# Altium PCB RD15002WV-20150923.PcbDoc (part 1 of 2)
Units mil, origin at the board's own origin, x right, y up, seen from the top; angles counter-clockwise.
Board outline 4341.03 x 4341.12 mil, 2 copper layers (Top Layer, Bottom Layer); 295 components, 256 nets, 1005 pads, 234 vias.
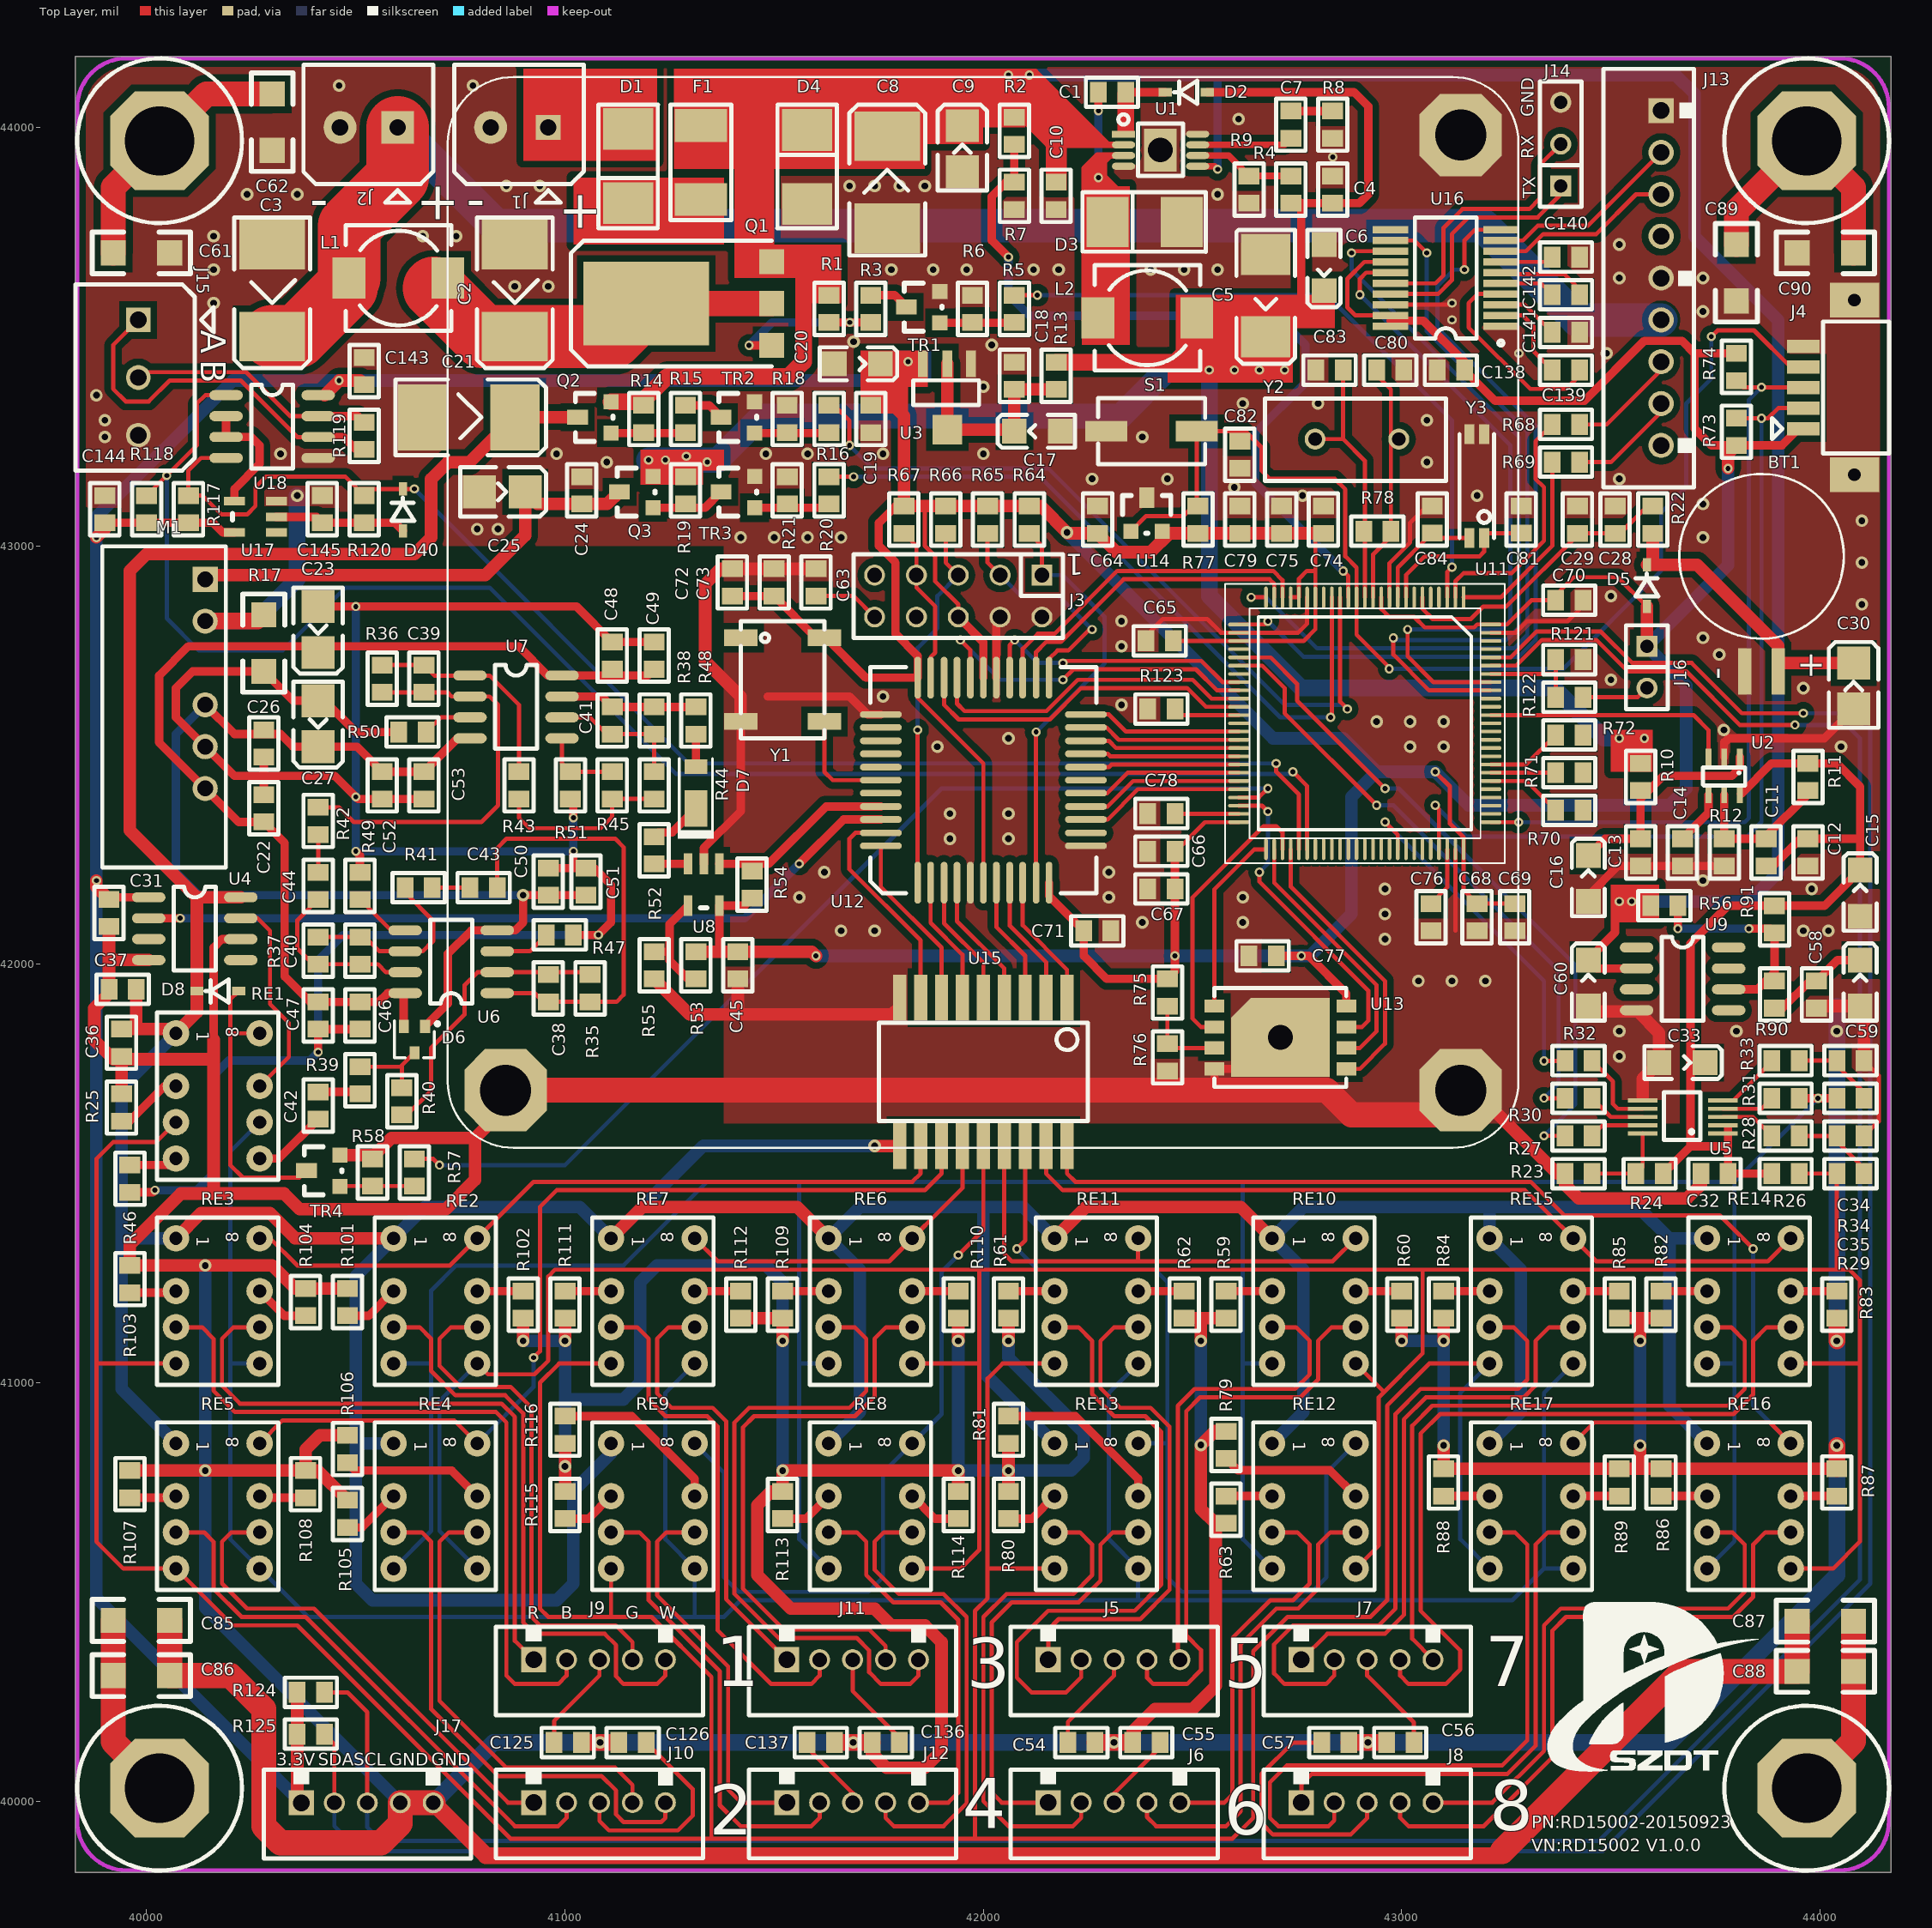
[diagram p0: Top Layer view]
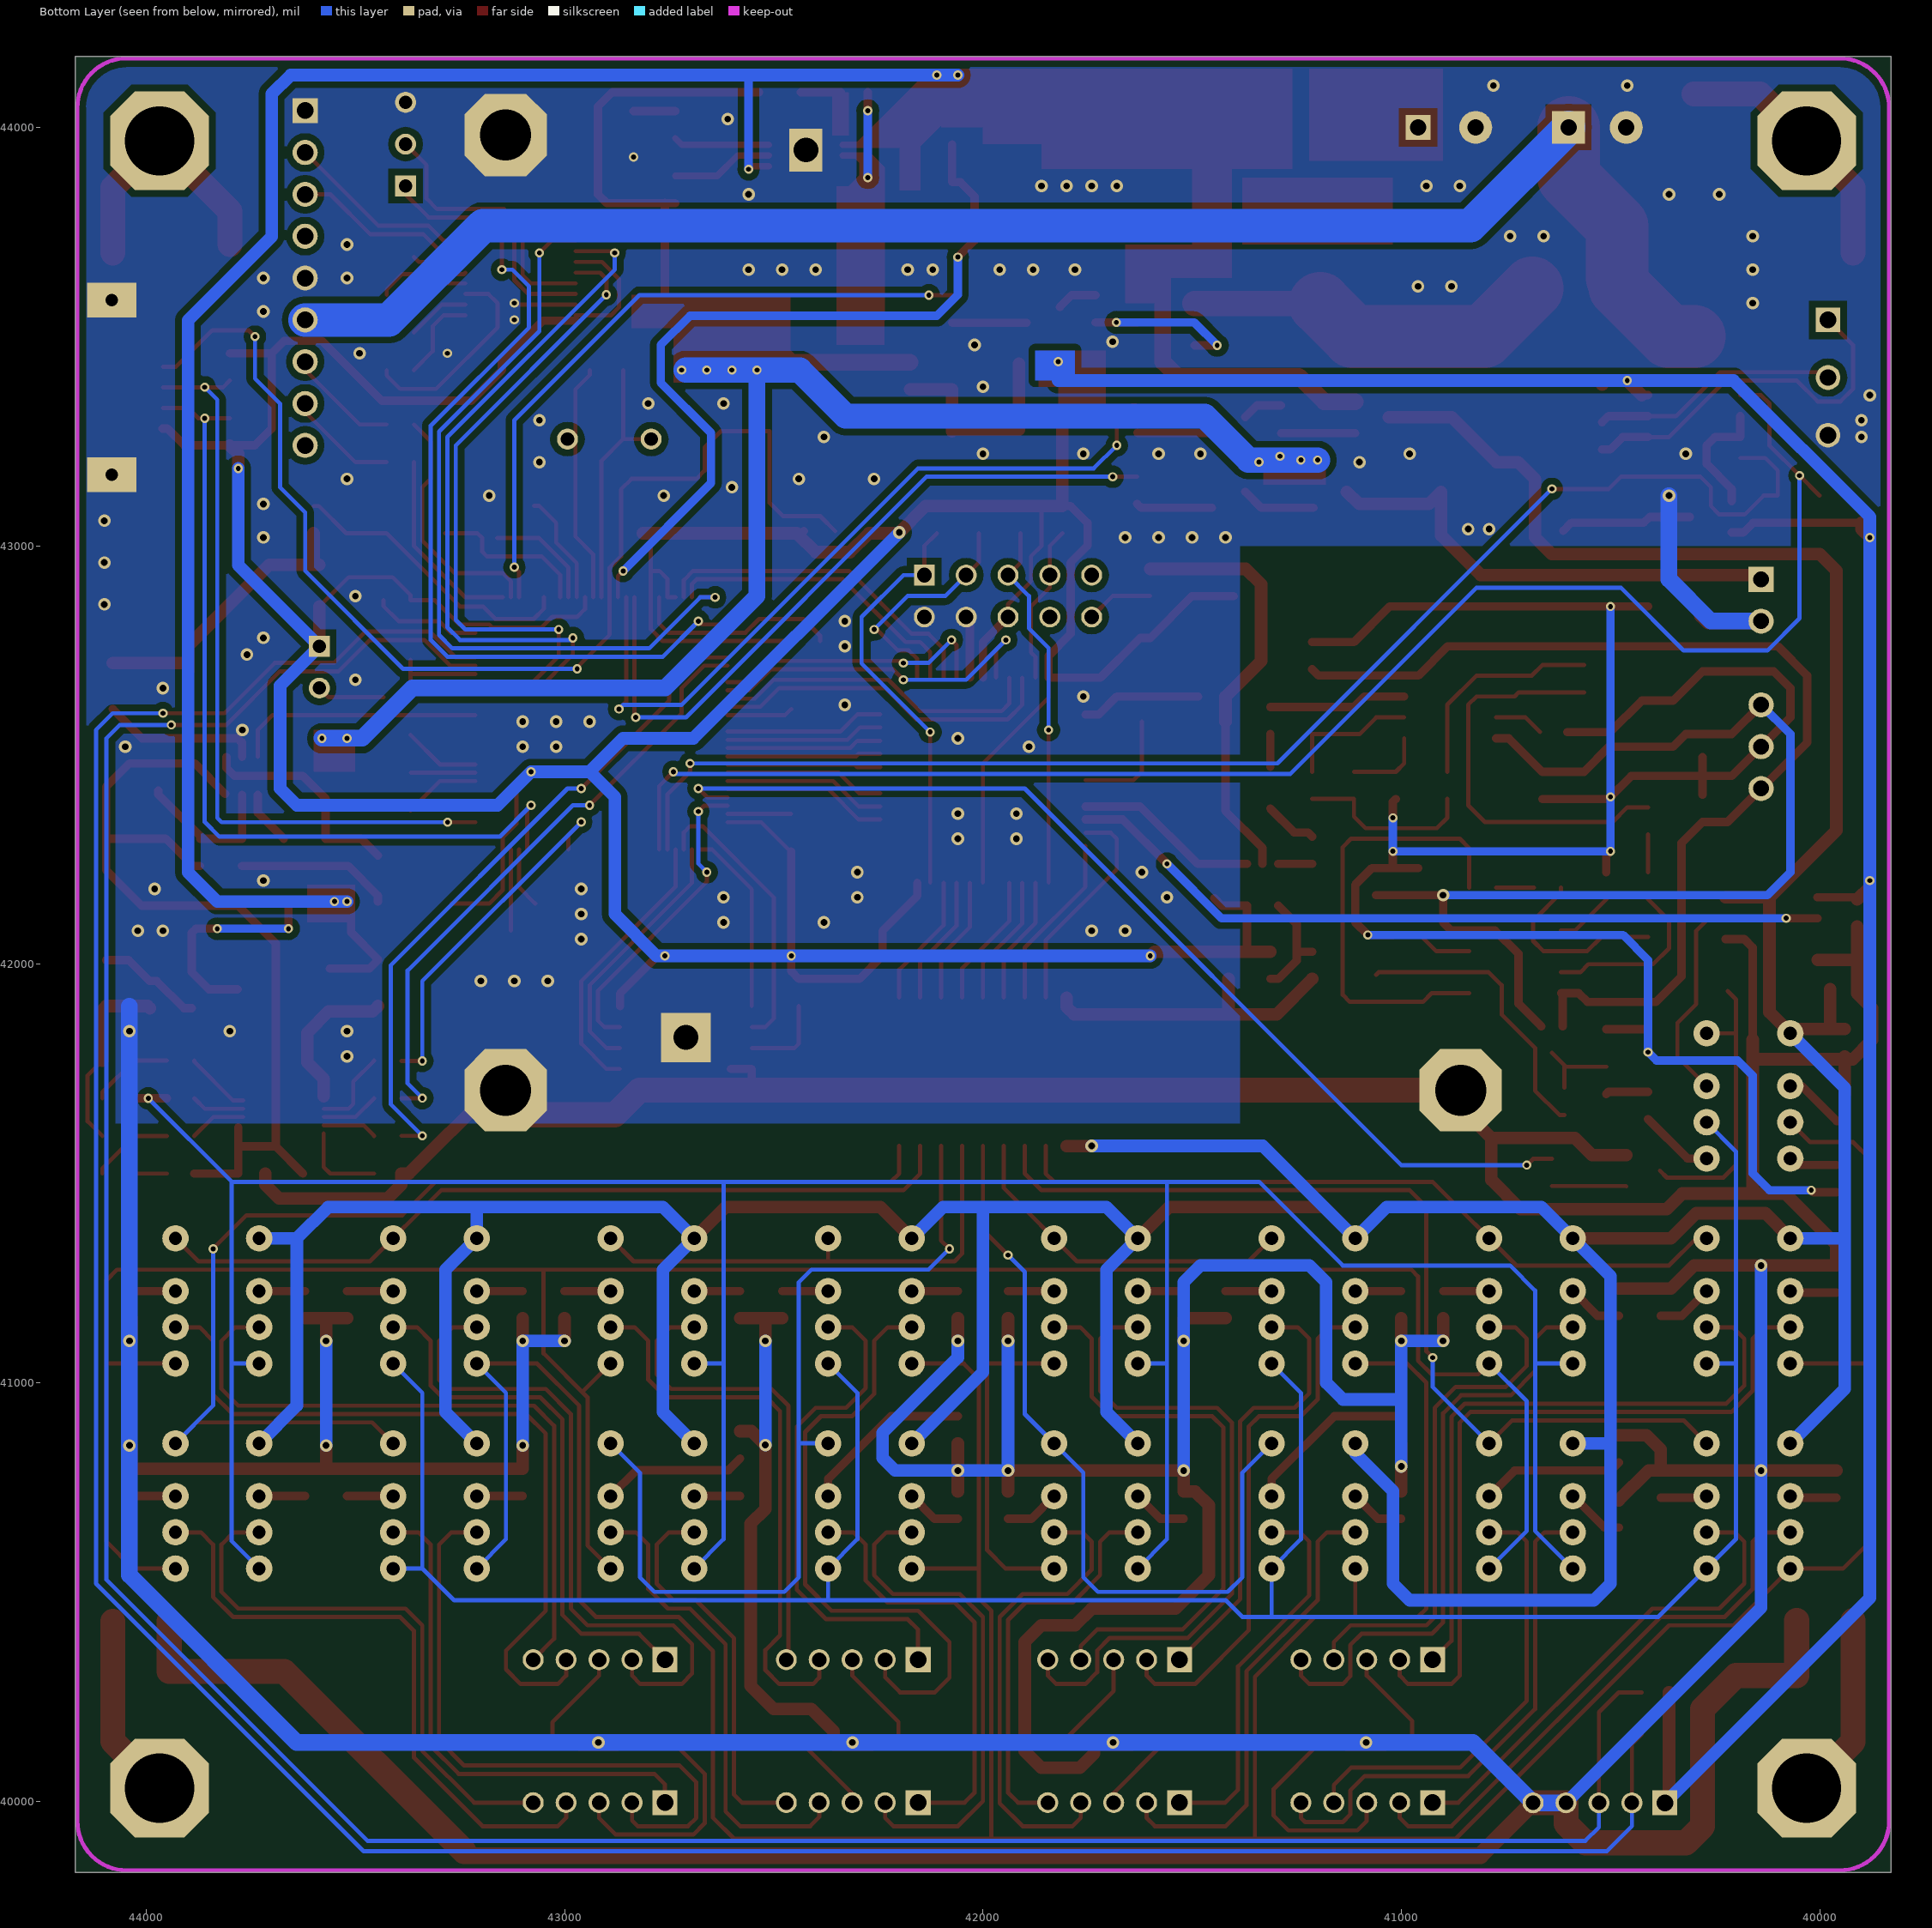
[diagram p1: Bottom Layer view, seen from below]

## Layer stack, top to bottom
Top Layer: signal copper 1.4
Dielectric: dielectric 12.6, FR-4, Dk 4.8
Bottom Layer: signal copper 1.4

## Board outline
39828.95,39829.02 44169.98,39829.02 44169.98,44170.15 39828.95,44170.15

## Design rules (kind name [scope] priority, off if disabled: settings)
Clearance Clearance_1 [All] p1 off: gap=16
Clearance [All] p2: gap=6
ComponentClearance [All] p1 off: gap=10 collisioncheckmode=3 verticalgap=10 showdistances=FALSE
Height [All] p1 off: minheight=0 maxheight=1000 prefheight=500
HoleSize [All] p1: absolutevalues=TRUE maxlimit=1000 minlimit=1 maxpercent=80.000 minpercent=20.000
MinimumSolderMaskSliver [All] p1: minsoldermaskwidth=0
PolygonConnect [All] p1: connectstyle=Direct reliefconductorwidth=10 reliefentries=4 polygonreliefangle="90 Angle" airgapwidth=10
RoutingPriority [All] p1: routingpriority=4
RoutingVias [All] p1: holewidth=20 width=50 viastyle="Through Hole" minholewidth=28 minwidth=50 maxholewidth=28 maxwidth=50
SilkToSilkClearance [All] p1: silktosilkclearance=0
SilkToSolderMaskClearance [IsPad] p1: minsilkscreentomaskgap=0 clearancetoexposedcopper=TRUE
SolderMaskExpansion [All] p1: expansion=4
Width [All] p1: maxlimit=1000 minlimit=10 preferedwidth=10
21 further rules are at their usual default settings.

## Components (designator, comment, footprint, x,y, rotation, side; value= is the part's Value field where it differs from the comment)
BT1 "MS920T" MS920T 43900,42700 r270 top
C1 "10nF" CC0603 42275,44084 r0 top
C2 "100uF/20V" CD7343 40880,43500 r90 top
C3 "100uF/20V" CD7343 40300,43500 r90 top
C4 "0.1uF" CC0603 42835,43884 r270 top
C5 "100uF/6.3V" CC6032 42675,43500 r90 top
C6 "10uF/16V" CA3216 42814.37,43610 r90 top
C7 "1.5nF" CC0603 42735,44039 r270 top
C8 "100uF/20V" CD7343 41770.22,43979 r270 top
C9 "22uF/16V" CB3528 41949.83,44004 r270 top
C10 "0.1uF" CC0603 42173.88,43804 r90 top
C11 "15pF" CC0603 43871,42235 r90 top
C12 "0.1uF" CC0603 43971,42235 r90 top
C13 "1uF" CC0603 43571,42235 r90 top
C14 "0.1uF" CC0603 43671,42235 r90 top
C15 "4.7uF/10V" CA3216 44095.74,42225 r270 top
C16 "4.7uF/10V" CA3216 43446,42260 r270 top
C17 "4.7uF/10V" CA3216 42074,43274 r0 top
C18 "0.1uF" CC0603 42074,43439 r270 top
C19 "0.1uF" CC0603 41731,43270.63 r90 top
C20 "4.7uF/10V" CA3216 41754,43435 r180 top
C21 "100uF/20V" CD7343 40880,43307 r180 top
C22 "0.1uF" CC0603 40280,42405 r270 top
C23 "22uF/16V" CB3528 40410,42745 r90 top
C24 "0.1uF" CC0603 41040,43165 r270 top
C25 "22uF/16V" CB3528 40905,43129 r180 top
C26 "0.1uF" CC0603 40280,42495 r90 top
C27 "22uF/16V" CB3528 40410,42520 r90 top
C28 "0.1uF" CC0603 43510,43095 r270 top
C29 "0.1uF" CC0603 43420,43095 r270 top
C30 "22uF/16V" CB3528 44080,42720 r270 top
C31 "0.1uF" CC0603 39910,42155 r270 top
C32 "0.1uF" CC0603 43715,41499.63 r0 top
C33 "10uF/16V" CA3216 43725,41765 r180 top
C34 "Cap" CC0603 44040,41769.63 r0 top
C35 "Cap" CC0603 44040,41589.63 r0 top
C36 "0.1uF" CC0603 39940,41780 r90 top
C37 "0.1uF" CC0603 39910,41940 r0 top
C38 "100pF" CC0603 40960,41910 r90 top
C39 "100pF" CC0603 40663,42715 r270 top
C40 "100pF" CC0603 40510,42000 r90 top
C41 "100pF" CC0603 41113,42615 r270 top
C42 "0.1uF" CC0603 40410,41695 r270 top
C43 "0.1uF" CC0603 40773,42183 r0 top
C44 "0.1uF" CC0603 40410,42220 r270 top
C45 "0.1uF" CC0603 41413,41965 r90 top
C46 "0.1uF" CC0603 40510,41845 r90 top
C47 "1uF" CC0603 40410,41845 r90 top
C48 "1uF" CC0603 41113,42770 r270 top
C49 "0.1uF" CC0603 41213,42770 r270 top
C50 "0.1uF" CC0603 40960,42165 r90 top
C51 "0.1uF" CC0603 41050,42165 r90 top
C52 "1uF" CC0603 40563,42460 r270 top
C53 "1uF" CC0603 40663,42460 r270 top
C54 "Cap" CC0603 42267,40140 r180 top
C55 "Cap" CC0603 42357,40140 r0 top
C56 "Cap" CC0603 42964,40140 r0 top
C57 "Cap" CC0603 42874,40140 r180 top
C58 "0.1uF" CC0603 43991.37,41895 r90 top
C59 "4.7uF/10V" CA3216 44095.74,42010 r270 top
C60 "10uF/16V" CA3216 43446,42010 r270 top
C61 "CC1206KRX7R0BB102" CC1206 39920,43700 r0 top
C62 "CC1206KRX7R0BB102" CC1206 40300,44080 r270 top
C63 "0.1uF" CC0603 41600,42945 r270 top
C64 "0.1uF" CC0603 42273,43030 r90 top
C65 "0.1uF" CC0603 42454,42773 r180 top
C66 "0.1uF" CC0603 42458,42270 r180 top
C67 "0.1uF" CC0603 42458,42180 r180 top
C68 "0.1uF" CC0603 43180,42145 r270 top
C69 "0.1uF" CC0603 43270,42145 r270 top
C70 "0.1uF" CC0603 43368,42870 r0 top
C71 "0.1uF" CC0603 42240,42080 r0 top
C72 "0.1uF" CC0603 41400,42880 r90 top
C73 "0.1uF" CC0603 41500,42880 r90 top
C74 "0.1uF" CC0603 42813,43095 r270 top
C75 "0.1uF" CC0603 42713,43095 r270 top
C76 "0.1uF" CC0603 43070,42145 r270 top
C77 "0.1uF" CC0603 42700,42020 r180 top
C78 "0.1uF" CC0603 42458,42360 r180 top
C79 "0.1uF" CC0603 42613,43095 r270 top
C80 "20pF" CC0603 42940,43420 r0 top
C81 "10pF" CC0603 43285.68,43095.38 r270 top
C82 "1uF" CC0603 42613,43185 r90 top
C83 "20pF" CC0603 42860,43420 r180 top
C84 "10pF" CC0603 43073,43095.38 r270 top
C85 "CC1206KRX7R0BB102" CC1206 39920,40432 r0 top
C86 "CC1206KRX7R0BB102" CC1206 39920,40300 r0 top
C87 "CC1206KRX7R0BB102" CC1206 44080,40430 r180 top
C88 "CC1206KRX7R0BB102" CC1206 44080,40310 r180 top
C89 "CC1206KRX7R0BB102" CC1206 43800,43720 r270 top
C90 "CC1206KRX7R0BB102" CC1206 44080,43700 r180 top
C125 "Cap" CC0603 41039,40140 r180 top
C126 "Cap" CC0603 41129,40140 r0 top
C136 "Cap" CC0603 41734,40140 r0 top
C137 "Cap" CC0603 41644,40140 r180 top
C138 "0.1uF" CC0603 43150,43420 r180 top
C139 "0.1uF" CC0603 43360,43420 r0 top
C140 "0.1uF" CC0603 43360,43690 r0 top
C141 "0.1uF" CC0603 43425,43510 r180 top
C142 "0.1uF" CC0603 43360,43600 r0 top
C143 "0.1uF" CC0603 40520,43385.25 r90 top
C144 "0.1uF" CC0603 39900,43055 r90 top
C145 "100pF" CC0603 40420,43120.25 r270 top
D1 "SS24" SSMB 41151,43996.17 r90 top
D2 "CMDSH-3" SOD323 42535,44084 r180 top
D3 "SS24" SSMB 42474,43774 r0 top
D4 "SMBJ18A" SMB 41578.67,43816.83 r90 top
D5 "CMDSH-3" SOD323 43586,42855 r90 top
D6 "DESD1P0RFW-7" SOT-323 40640,41820 r270 top
D7 "DFLS1200-7" powerDI123 41313,42422.25 r90 top
D8 "CMDSH-3" SOD323 40220,41936 r180 top
D40 "1N4148" SOD323 40612.56,43036 r90 top
F1 "500mA" CC1812 41324.83,43827.62 r90 top
J1 "DC12V" ECH350H-2P#1 40960,44000 r180 top
J2 "DTU-POWER" ECH350H-2P#2 40600,44000 r180 top
J3 "Header 5X2" IDC10-2.54MM 42140,42930 r180 top
J4 "Header 5" MOLEX532610571 43960,43280 r90 top
J5 "CON5" CON5-2.0MM 42155,40338 r0 top
J6 "CON5" CON5-2.0MM 42155,39996.26 r0 top
J7 "CON5" CON5-2.0MM 42760,40338 r0 top
J8 "CON5" CON5-2.0MM 42760,39996.26 r0 top
J9 "CON5" CON5-2.0MM 40925,40338 r0 top
J10 "CON5" CON5-2.0MM 40925,39996.26 r0 top
J11 "CON5" CON5-2.0MM 41530,40338 r0 top
J12 "CON5" CON5-2.0MM 41530,39996.26 r0 top
J13 "HD-DB9" CON9-2.54MM 43620,44040 r270 top
J14 "COM2" SIP3-2.54 43380,43860 r90 top
J15 "COM3" ECH350H-3P 39980,43540 r270 top
J16 "BOOT" SIP2-2.54MM 43586,42760 r270 top
J17 "CON5" CON5-2.0MM 40370,39996 r0 top
L1 "10uH" SLF6025 40720,43640 r180 top
L2 "10uH" SLF6025 42274,43545 r0 top
M1 "NMH050XSC" NMH_SC 40140,42920 r270 top
Q1 "FR5305" TO-252 41494,43479 r90 top
Q2 "CJ2301" SOT-23W 41110.02,43269.64 r90 top
Q3 "CJ2301" SOT-23W 41210.11,43091.02 r90 top
R1 "10K" CC0603 41631,43534 r90 top
R2 "499K" CC0603 42073.88,44024 r270 top
R3 "10K" CC0603 41731,43534 r90 top
R4 "330K" CC0603 42735,43819 r90 top
R5 "1K" CC0603 42073.99,43534 r90 top
R6 "10K" CC0603 41973.99,43599 r270 top
R7 "100K" CC0603 42073.88,43869 r270 top
R8 "4.7K" CC0603 42835,43974 r90 top
R9 "100K" CC0603 42635,43819 r90 top
R10 "0R" CC0603 43571,42415 r90 top
R11 "51K" CC0603 43971,42480 r270 top
R12 "30.1K" CC0603 43771,42235 r90 top
R13 "0R" CC0603 42174,43374 r90 top
R14 "10K" CC0603 41188.01,43270.63 r90 top
R15 "10K" CC0603 41288.01,43270.63 r90 top
R16 "1K" CC0603 41631,43270.63 r90 top
R17 "0R" CC1206 40280,42700 r90 top
R18 "10K" CC0603 41531,43335.63 r270 top
R19 "10K" CC0603 41288.1,43100 r90 top
R20 "1K" CC0603 41631.1,43100 r90 top
R21 "10K" CC0603 41531.1,43165 r270 top
R22 "1K" CC0603 43600,43095 r270 top
R23 "10K" CC0603 43390,41499.63 r0 top
R24 "10K" CC0603 43625,41499.63 r180 top
R25 "1K" CC0603 39940,41625 r90 top
R26 "1K" CC0603 43950,41499.63 r180 top
R27 "22R" CC0603 43390,41589.63 r0 top
R28 "1K" CC0603 43950,41589.63 r180 top
R29 "1K" CC0603 44040,41499.63 r0 top
R30 "22R" CC0603 43390,41679.63 r0 top
R31 "1K" CC0603 43950,41679.63 r180 top
R32 "22R" CC0603 43390,41769.63 r0 top
R33 "1K" CC0603 43950,41769.63 r180 top
R34 "1K" CC0603 44040,41679.63 r0 top
R35 "100K" CC0603 41060,41910 r90 top
R36 "100K" CC0603 40563,42715 r270 top
R37 "100K" CC0603 40410,42000 r90 top
R38 "100K" CC0603 41213,42615 r270 top
R39 "1K" CC0603 40510,41755 r270 top
R40 "4.7K" CC0603 40610,41640 r90 top
R41 "4.7K" CC0603 40618,42183 r0 top
R42 "4.7K" CC0603 40410,42375 r270 top
R43 "4.7K" CC0603 40890,42395 r90 top
R44 "4.7K" CC0603 41213,42460 r270 top
R45 "4.7K" CC0603 41113,42460 r270 top
R46 "1K" CC0603 39960,41520 r270 top
R47 "1K" CC0603 40955,42070 r0 top
R48 "1K" CC0603 41313,42615 r270 top
R49 "1K" CC0603 40510,42155 r90 top
R50 "1K" CC0603 40668,42555 r180 top
R51 "1K" CC0603 41013,42460 r270 top
R52 "1K" CC0603 41213,42240 r90 top
R53 "100K" CC0603 41313,42030 r270 top
R54 "10K" CC0603 41447,42158 r90 top
R55 "100K" CC0603 41213,42030 r270 top
R56 "357R" CC0603 43660,42140 r180 top
R57 "1K" CC0603 40639.99,41470 r90 top
R58 "10K" CC0603 40539.99,41535 r270 top
R59 "1K" CC0603 42580,41154 r90 top
R60 "1K" CC0603 43000,41219 r270 top
R61 "1K" CC0603 42060,41154 r90 top
R62 "1K" CC0603 42480,41219 r270 top
R63 "1K" CC0603 42580,40664 r90 top
R64 "4.7K" CC0603 42110,43030 r90 top
R65 "4.7K" CC0603 42010,43030 r90 top
R66 "4.7K" CC0603 41910,43095 r270 top
R67 "4.7K" CC0603 41810,43030 r90 top
R68 "22R" CC0603 43425,43290 r180 top
R69 "22R" CC0603 43425,43200 r180 top
R70 "22R" CC0603 43368,42368 r0 top
R71 "22R" CC0603 43368,42458 r0 top
R72 "22R" CC0603 43368,42548 r0 top
R73 "10K" CC0603 43800,43240 r90 top
R74 "10K" CC0603 43800,43460 r270 top
R75 "10K" CC0603 42440,41965 r270 top
R76 "10K" CC0603 42440,41810 r270 top
R77 "10K" CC0603 42513,43030 r90 top
R78 "1M" CC0603 42974,43035 r180 top
R79 "1K" CC0603 42580,40819 r90 top
R80 "1K" CC0603 42060,40740 r270 top
R81 "1K" CC0603 42060,40920 r270 top
R82 "1K" CC0603 43620,41154 r90 top
R83 "1K" CC0603 44040,41219 r270 top
R84 "1K" CC0603 43100,41154 r90 top
R85 "1K" CC0603 43520,41219 r270 top
R86 "1K" CC0603 43620,40794 r270 top
R87 "1K" CC0603 44039.98,40729.02 r90 top
R88 "1K" CC0603 43100,40794 r270 top
R89 "1K" CC0603 43519.97,40729.03 r90 top
R90 "0R" CC0603 43891,41895 r90 top
R91 "0R" CC0603 43891,42140 r270 top
R101 "1K" CC0603 40480,41225 r270 top
R102 "1K" CC0603 40900,41219 r270 top
R103 "1K" CC0603 39960,41280 r270 top
R104 "1K" CC0603 40380,41160 r90 top
R105 "1K" CC0603 40480,40719 r270 top
R106 "1K" CC0603 40480,40809 r90 top
R107 "1K" CC0603 39960,40790 r270 top
R108 "1K" CC0603 40380,40725 r90 top
R109 "1K" CC0603 41520,41154 r90 top
R110 "1K" CC0603 41940,41219 r270 top
R111 "1K" CC0603 41000,41154 r90 top
R112 "1K" CC0603 41420,41219 r270 top
R113 "1K" CC0603 41520,40740 r270 top
R114 "1K" CC0603 41940,40675 r90 top
R115 "1K" CC0603 41000,40740 r270 top
R116 "1K" CC0603 41000,40920 r270 top
R117 "10K" CC0603 40100,43120 r270 top
R118 "10K" CC0603 40000,43055 r90 top
R119 "120R" CC0603 40520,43230.25 r90 top
R120 "10K" CC0603 40520,43120.25 r270 top
R121 "100K" CC0603 43368,42728 r0 top
R122 "1K" CC0603 43433,42638 r180 top
R123 "100K" CC0603 42393,42610 r0 top
R124 "3.3K" CC0603 40360,40260 r0 top
R125 "3.3K" CC0603 40360,40160 r0 top
RE1 "G6K" G6K 40070,41835 r270 top
RE2 "G6K" G6K 40590,41345 r270 top
RE3 "G6K" G6K 40070,41345 r270 top
RE4 "G6K" G6K 40590,40855 r270 top
RE5 "G6K" G6K 40070,40855 r270 top
RE6 "G6K" G6K 41630,41345 r270 top
RE7 "G6K" G6K 41110,41345 r270 top
RE8 "G6K" G6K 41630,40855 r270 top
RE9 "G6K" G6K 41110,40855 r270 top
RE10 "G6K" G6K 42690,41345 r270 top
RE11 "G6K" G6K 42170,41345 r270 top
RE12 "G6K" G6K 42690,40855 r270 top
RE13 "G6K" G6K 42170,40855 r270 top
RE14 "G6K" G6K 43730,41345 r270 top
RE15 "G6K" G6K 43210,41345 r270 top
RE16 "G6K" G6K 43730,40855 r270 top
RE17 "G6K" G6K 43210,40855 r270 top
S1 "SW-PB" SPST 42294,43274 r0 top
TR1 "MMBT3904" SOT-23W 41896,43533.02 r90 top
TR2 "MMBT3904" SOT-23W 41453.01,43269.64 r90 top
TR3 "MMBT3904" SOT-23W 41453.1,43091.02 r90 top
TR4 "MMBT3904" SOT-23W 40462,41469.02 r90 top
U1 "LT1767" MS8 42335,43984 r0 top
U2 "TPS3901" SOT-26 43808,42495.32 r180 top
U3 "GM6250" SOT-89 41970,43435 r180 top
U4 "FAN7371" SO-8 40005,42160 r0 top
U5 "LTC2402" MS10 43768,41595.63 r90 top
U6 "LT1807" SO-8 40838,41931 r180 top
U7 "LT1807" SO-8 40773,42690 r0 top
U8 "TLV3491AID" SOT-23-5 41369,42240 r0 top
U9 "LT1019AIS8-5" SO-8 43561.37,42040 r0 top
U11 "STM32F407VE_100" TQFP100 43148,42877 r270 top
U12 "LC4064V" QFP44 41843,42195 r90 top
U13 "SST25VF064C" WSON-8 42710,41825 r0 top
U14 "STM1001TWX6F" SOT-23W 42353,43035 r0 top
U15 "ULN2803A" DSO18 42200,41920 r180 top
U16 "MAX3223EEAP" TSSOP20 43237,43525 r180 top
U17 "74HC1G14" SOT-23-5 40310,43032 r270 top
U18 "SN65HVD72/75/78" SO-8 40190,43360 r0 top
Y1 "1MHz" PCRYSTAL 41420,42780 r270 top
Y2 "8M" XCYAI 42893,43255 r0 top
Y3 "MC-146" MC-146 43197.06,43019 r90 top
? "" LOGO 43575,40275 r0 top

## Footprints (in the part's own frame and the unit in brackets; to place one, negate y for a bottom-side part, rotate by r counter-clockwise, add the part's x,y. Pads: shape width x height; smd on the part's side, far side on the other; paste and mask are expansions set on the pad)
CA3216 [mm]
  rect 1.5x1.5 smd: 1(0,0) 2(2.794,0)
  silkscreen extent -1.02,-1 3.68,1
CB3528 [mm]
  rect 2x2 smd: 1(0,0) 2(2.794,0)
  silkscreen extent -1.27,-1.5 3.94,1.5
CC0603 [mil]
  rect 40x50 smd: 1(0,0) 2(65,0)
  silkscreen extent -30,-35 95,35
CC1206 [mil]
  rect 60x60 smd: 1(0,0) 2(135,0)
  silkscreen extent -50,-50 185,50
CC1812 [mm]
  rect 2x3.2 smd: 1(0,0) 2(4.5,0)
  silkscreen extent -1.25,-1.85 5.75,1.85
CC6032 [mm]
  rect 2.5x3 smd: 1(0,0) 2(5,0)
  silkscreen extent -1.65,-1.78 6.48,1.78
CD7343 [mm]
  rect 3x4 smd: 1(0,0) 2(5.588,0)
  silkscreen extent -1.91,-2.3 7.24,2.3
CON5-2.0MM [mil]
  rect 60x60 hole 40: 1(0,0)
  round 50 hole 35: 2(78.74,0) 3(157.48,0) 4(236.22,0) 5(314.96,0)
  silkscreen extent -90,-133 405,79
CON9-2.54MM [mil]
  rect 60x60 hole 40: 1(0,0)
  round 60 hole 40: 2(100,0) 3(200,0) 4(300,0) 5(400,0) 6(500,0) 7(600,0) 8(700,0) 9(800,0)
  silkscreen extent -100,-138 900,79
DSO18 [mm]
  rect 0.8x2.8 smd: 1(0,0) 2(1.27,0) 3(2.54,0) 4(3.81,0) 5(5.08,0) 6(6.35,0) 7(7.62,0) 8(8.89,0) 9(10.16,0) 10(10.16,9) 11(8.89,9) 12(7.62,9) 13(6.35,9) 14(5.08,9) 15(3.81,9) 16(2.54,9) 17(1.27,9) 18(0,9)
  silkscreen extent -1.27,1.52 11.43,7.49
ECH350H-2P#1 [mm]
  rect 1.5x1.5 hole 1: 1(0,0)
  round 2 hole 1: 2(3.5,0)
  silkscreen extent -2.16,-3.81 5.72,4.57
ECH350H-2P#2 [mm]
  rect 2x2 hole 1: 1(0,0)
  round 2 hole 1: 2(3.5,0)
  silkscreen extent -2.16,-3.81 5.72,4.57
ECH350H-3P [mm]
  rect 1.5x1.5 hole 1: 1(0,0)
  round 1.5 hole 1: 2(3.5,0) 3(7,0)
  silkscreen extent -2.16,-3.81 9.14,4.57
G6K [mm]
  round 1.6 hole 0.8: 1(0,0) 2(3.2,0) 3(5.4,0) 4(7.6,0) 5(7.6,5.08) 6(5.4,5.08) 7(3.2,5.08) 8(0,5.08)
  silkscreen extent -1.27,-1.14 8.89,6.22
IDC10-2.54MM [mil]
  rect 50x50 hole 35: 1(0,0)
  round 50 hole 35: 2(0,100) 3(100,0) 4(100,100) 5(200,0) 6(200,100) 7(300,0) 8(300,100) 9(400,0) 10(400,100)
  silkscreen extent -50,-50 450,150
LOGO [mil]
  silkscreen extent -227,-203 278,200
MC-146 [mm]
  rect 1.2x0.6 smd: 1(0,0) 2(6.3,0) 3(6.3,0.9) 4(0,0.9)
  silkscreen extent 0,-0.6 6.3,1.5
MOLEX532610571 [mm]
  rect 0.8x2 smd: 1(0,0) 2(1.25,0) 3(2.5,0) 4(3.75,0) 5(5,0)
  rect 2.1x3 hole 0.762: ""(-2.8,-3.1) ""(7.8,-3.1)
  silkscreen extent -1.5,-5.2 6.5,1.91
MS8 [mm]
  rect 1.4x0.42 smd: 1(0,0)
  oval 1.4x0.42 smd: 2(0,-0.65) 3(0,-1.3) 4(0,-1.95) 5(4.5,-1.95) 6(4.5,-1.3) 7(4.5,-0.65) 8(4.5,0)
  rect 2x2.6 hole 1.5: ""(2.235,-0.965)
  silkscreen extent -0.31,-2.54 3.61,1.2
MS10 [mm]
  rect 0.254x1.8 smd: 1(0,0) 2(0.5,0) 3(1,0) 4(1.5,0) 5(2,0) 6(2,4.88) 7(1.5,4.88) 8(1,4.88) 9(0.5,4.88) 10(0,4.88)
  silkscreen extent -0.4,1.38 2.5,3.58
MS920T [mm]
  rect 2.8x0.8 smd: 1(0,0) 2(0,-2.032)
  silkscreen extent -11.98,-6.01 -1.99,3.98
NMH_SC [mil]
  rect 60x60 hole 38: 1(0,0)
  round 60 hole 38: 2(100,0) 4(300,0) 5(400,0) 6(500,0)
  silkscreen extent -79,-246 689,49
PCRYSTAL [mil]
  rect 40x80 smd: 1(0,0) 2(200,0) 3(200,200) 4(0,200)
  silkscreen extent -40,0 240,200
powerDI123 [mm]
  rect 2.2x1.4 smd: 1(-1.275,0)
  rect 0.9x1.4 smd: 2(1.275,0)
  silkscreen extent -3.1,-1.09 1.76,1.09
QFP44 [mil]
  oval 100x15.98 smd: 1(0,0)
  oval 100x16 smd: 2(0,-31) 3(0,-63) 4(0,-94) 5(0,-126) 6(0,-157) 7(0,-188) 8(0,-220) 9(0,-251) 10(0,-283) 11(0,-314) 23(490,-314) 24(490,-283) 25(490,-251) 26(490,-220) 27(490,-188) 28(490,-157) 29(490,-126) 30(490,-94) 31(490,-63) 32(490,-31) 33(490,0)
  oval 16x100 smd: 12(88,-402) 13(119,-402) 14(151,-402) 15(182,-402) 16(214,-402) 17(245,-402) 18(276,-402) 19(308,-402) 20(339,-402) 21(371,-402) 22(402,-402) 34(402,88) 35(371,88) 36(339,88) 37(308,88) 38(276,88) 39(245,88) 40(214,88) 41(182,88) 42(151,88) 43(119,88)
  oval 15.98x100 smd: 44(87.99,87.99)
  silkscreen extent -25,-427 515,113
SIP2-2.54MM [mil]
  rect 50x50 hole 32: 1(0,0)
  round 50 hole 32: 2(100,0)
  silkscreen extent -50,-50 150,50
SIP3-2.54 [mil]
  rect 50x50 hole 32: 1(0,0)
  round 50 hole 32: 2(100,0) 3(200,0)
  silkscreen extent -50,-50 250,50
SLF6025 [mm]
  rect 2x2.5 smd: 1(0,0) 2(6,0)
  silkscreen extent -0.2,-3.2 6.2,3.2
SMB [mil]
  rect 100x120 smd: 1(0,0) 2(177.17,0)
  silkscreen extent -58,-71 237,71
SO-8 [mil]
  oval 80x24 smd: 1(0,0) 2(0,-50) 3(0,-100) 4(0,-150) 5(220,-150) 6(220,-100) 7(220,-50) 8(220,0)
  silkscreen extent 60,-175 160,25
SOD323 [mm]
  rect 0.8x0.5 smd: 1(0,0) 2(2.54,0)
  silkscreen extent 0.61,-0.7 2.01,0.7
SOT-23-5 [mil]
  rect 20x50 smd: 1(0,0) 2(-37,0) 3(-75,0) 4(-75,-100) 5(0,-100)
  silkscreen extent -45,-105 -30,-105
SOT-23W [mil]
  rect 35.98x35.98 smd: 1(0,0) 2(75,0)
  rect 35.98x50 smd: 3(37.99,80)
  silkscreen extent -20,-5 95,85
SOT-26 [mm]
  rect 0.35x1 smd: 1(0,0) 2(0.95,0) 3(1.9,0) 4(1.9,2.3) 5(0.95,2.3) 6(0,2.3)
  silkscreen extent -0.33,0.64 2.24,1.73
SOT-89 [mm]
  rect 0.6x1.6 smd: 1(0,0) 2(1.42,0) 3(2.92,0)
  rect 1.8x1.8 smd: 2(1.42,4)
  silkscreen extent -0.5,1 3.5,2.5
SOT-323 [mm]
  rect 0.8x0.6 smd: 1(-0.8,0.65) 2(-0.8,-0.65) 3(0.8,0)
  silkscreen extent -1.14,-1.22 1.09,1.49
SPST [mil]
  rect 100x50 smd: 1(0,0) 2(216,0)
  silkscreen extent -20,-79 236,79
SSMB [mil]
  rect 100x120 smd: 1(0,0) 2(-177.17,0)
  silkscreen extent -237,-71 58,71
TO-252 [mil]
  rect 60x60 smd: 1(0,0) 2(100,0) 3(200,0)
  rect 200x300 smd: 2(100,300)
  silkscreen extent -50,0 250,480
TQFP100 [mm]
  rect 1.3x0.22 smd: 1(0,0)
  oval 1.3x0.22 smd: 2(0,-0.5) 3(0,-1) 4(0,-1.5) 5(0,-2) 6(0,-2.5) 7(0,-3) 8(0,-3.5) 9(0,-4) 10(0,-4.5) 11(0,-5) 12(0,-5.5) 13(0,-6) 14(0,-6.5) 15(0,-7) 16(0,-7.5) 17(0,-8) 18(0,-8.5) 19(0,-9) 20(0,-9.5) 21(0,-10) 22(0,-10.5) 23(0,-11) 24(0,-11.5) 25(0,-12) 51(15.3,-12) 52(15.3,-11.5) 53(15.3,-11) 54(15.3,-10.5) 55(15.3,-10) 56(15.3,-9.5) 57(15.3,-9) 58(15.3,-8.5) 59(15.3,-8) 60(15.3,-7.5) 61(15.3,-7) 62(15.3,-6.5) 63(15.3,-6) 64(15.3,-5.5) 65(15.3,-5) 66(15.3,-4.5) 67(15.3,-4) 68(15.3,-3.5) 69(15.3,-3) 70(15.3,-2.5) 71(15.3,-2) 72(15.3,-1.5) 73(15.3,-1) 74(15.3,-0.5) 75(15.3,0)
  oval 0.22x1.3 smd: 26(1.65,-13.65) 27(2.15,-13.65) 28(2.65,-13.65) 29(3.15,-13.65) 30(3.65,-13.65) 31(4.15,-13.65) 32(4.65,-13.65) 33(5.15,-13.65) 34(5.65,-13.65) 35(6.15,-13.65) 36(6.65,-13.65) 37(7.15,-13.65) 38(7.65,-13.65) 39(8.15,-13.65) 40(8.65,-13.65) 41(9.15,-13.65) 42(9.65,-13.65) 43(10.15,-13.65) 44(10.65,-13.65) 45(11.15,-13.65) 46(11.65,-13.65) 47(12.15,-13.65) 48(12.65,-13.65) 49(13.15,-13.65) 50(13.65,-13.65) 76(13.65,1.65) 77(13.15,1.65) 78(12.65,1.65) 79(12.15,1.65) 80(11.65,1.65) 81(11.15,1.65) 82(10.65,1.65) 83(10.15,1.65) 84(9.65,1.65) 85(9.15,1.65) 86(8.65,1.65) 87(8.15,1.65) 88(7.65,1.65) 89(7.15,1.65) 90(6.65,1.65) 91(6.15,1.65) 92(5.65,1.65) 93(5.15,1.65) 94(4.65,1.65) 95(4.15,1.65) 96(3.65,1.65) 97(3.15,1.65) 98(2.65,1.65) 99(2.15,1.65) 100(1.65,1.65)
  silkscreen extent -0.83,-14.47 16.15,2.5
TSSOP20 [mm]
  rect 2.15x0.45 smd: 1(0,0) 2(0,-0.65) 3(0,-1.3) 4(0,-1.95) 5(0,-2.6) 6(0,-3.25) 7(0,-3.9) 8(0,-4.55) 9(0,-5.2) 10(0,-5.85) 11(6.7,-5.85) 12(6.7,-5.2) 13(6.7,-4.55) 14(6.7,-3.9) 15(6.7,-3.25) 16(6.7,-2.6) 17(6.7,-1.95) 18(6.7,-1.3) 19(6.7,-0.65) 20(6.7,0)
  silkscreen extent -0.15,-6.6 5.23,1.17
WSON-8 [mm]
  rect 1.2x0.8 smd: 1(-4,1.905) 2(-4,0.635) 3(-4,-0.635) 4(-4,-1.905) 5(4,-1.905) 6(4,-0.635) 7(4,0.635) 8(4,1.905)
  rect 2x2 smd: 9(-2,-1.397) 9(2,-1.397) 9(2,1.397)
  oct 6x4.8 smd: 9(0,0)
  rect 3x3 hole 1.5: 9(0,0)
  silkscreen extent -4,-3 4,3
XCYAI [mil]
  round 50 hole 32: 1(-100,0) 2(100,0)
  silkscreen extent -220,-100 212,97

## Free pads (board coordinates)
  oct 196.85x196.85 hole 122.05: 1(43141,43982) 2(43141,41699) 3(40858,41699)
  oct 236.22x236.22 hole 165.35: 4(40031,43968) 5(40031,40031) 6(43968,40031) 7(43968,43968)

## Via types
v1: diameter 30, hole 16, Top Layer to Bottom Layer, 140 vias
v2: diameter 22, hole 12, Top Layer to Bottom Layer, 94 vias

## Nets (pads, with @x,y where several pads share a name; then routed paths per layer and width w, separated by ;. In a path a pad name is that pad's centre, name@x,y a point inside that pad or via, vN(x,y) a via of type N, cw(c..) or ccw(c..) an arc to the next point about the centre after c; other vN are vias at no path point)
3VAA_SW: U2.3 U11.89 | length 599.5
  Top Layer w10: U11.89@43212.96,42595.5 43697.5,42595.5 43733.2,42559.8 U2.3@43733.2,42495.32
5VAA_SW: R20.2 U11.17 | length 1725.3
  Top Layer w10: R20.2@41631.1,43165 v2(41690,43165) ; v2(42830,42590) 42833.04,42593.04 U11.17@42833.04,42877
  Bottom Layer w10: v2(41690,43165) 42135,43165 42710,42590 v2(42830,42590)
12V_SW: R16.2 U11.16 | length 1845.3
  Top Layer w10: R16.2@41634,43335.63 41643.37,43335.63 41680,43299 v2(41680,43240) ; U11.16@42852.72,42877 42852.72,42627.28 v2(42870,42610)
  Bottom Layer w10: v2(41680,43240) 41735,43185 42155,43185 42720,42620 42860,42620 v2(42870,42610)
+3.3AVDD: 
+3.3VAA: C11.1 C12.2 C15.1 C32.2 C33.1 R11.1 R24.1 R26.2 R91.1 U2.6 U5.1 U5.2 | length 2149.5
  Top Layer w20: R24.1@43625,41499.63 43690,41564.63 ; 43779.63,41564.63 43690,41564.63 ; 43780,41610 C32.2@43780,41499.63 R26.2@43885,41499.63 ; U2.6@43811,42407 43884,42480 R11.1@43971,42480 44040,42480 44095.74,42424.26 C15.1@44095.74,42225 44010.74,42140 43780,42140 43690,42050 43690,41564.63 ; C11.1@43871,42235 43888,42235 43953,42300 44095.74,42300
+3.3VDD: C19.2 C20.1 C31.1 C45.2 C64.1 C65.1 C66.1 C67.1 C68.1 C69.1 C70.1 C71.1 C72.1 C73.1 C74.2 C75.2 C77.1 C79.2 C138.1 C143.1 C144.1 D5.1 J3.6 J4.1 J16.1 J17.1 R53.1 R54.1 R64.2 R65.2 R66.1 R67.2 R73.1 R74.1 R75.1 R77.1 R117.2 R118.1 R124.1 R125.1 U3.3 U4.1 U8.5 U11.11 U11.19 U11.21 U11.22 U11.28 U11.50 U11.75 U11.100 U12.6 U12.11 U12.28 U12.33 U13.8 U14.2 U16.14 U16.19 U16.20 U17.5 U18.8 Y1.4 | length 19423.5
  Top Layer w10: U12.33@41843,42685 41843,42637 42000,42480 U12.6@42000,42195 ; 41860,43088 41860,43000 41885,42975 41885,42915 41940,42860 J3.6@41940,42830 ; C65.1@42454.33,42772.67 42765.67,42772.67 42793.67,42800.67 C74.2@42793.67,43029.67 ; C66.1@42458,42270 42460,42270 42529.6,42339.6 U11.50@42610.6,42339.6 ; U11.22@42734.61,42877 U11.21@42754.3,42877 42754.3,42921.3 42773,42940 42793.67,42940 ; U11.11@42951.15,42877 42951.15,42848.85 42970,42830 43030,42830 43055,42805 43173,42805 43180.04,42812.04 43252.04,42812.04 43310,42870 C70.1@43368,42870 43368,42882 43411,42925 43516,42925 D5.1@43586,42855 ; U16.19@42973.22,43550.59 42889.41,43550.59 42870,43570 42870,43638 42910.54,43678.54 U16.14@42973.22,43678.54 ; v2(43080,42460) 43115,42425 43115,42336 43148,42303 43148,42177 C68.1@43180,42145 C69.1@43270,42145
  Top Layer w20: C144.1@39900,43055 40159,43055 40182,43032 U17.5@40210,43032 ; C31.1@39910,42155 39915,42160 U4.1@40005,42160 ; U18.8@40410,43360 U18.8@40425,43360 ; 41369,42030 U8.5@41369,42140 41429,42140 R54.1@41447,42158 ; C72.1@41400,42880 C73.1@41500,42880 41600,42780 Y1.4@41620,42780 41624,42780 41719,42685 U12.33@41841,42685 ; R67.2@41810,43095 41790,43095 41750,43055 41750,43000 41790,42960 41790,42790 41843,42737 U12.33@41843,42685 ; J3.6@41940,42830 42000,42770 U12.28@42000,42685 ; U12.11@42157,42195 42157,42163 C71.1@42240,42080 42240,42020 42295,41965 R75.1@42440,41965 42458,41983 C66.1@42458,42270 ; U14.2@42428,43035 U14.2@42433,43030 ; C77.1@42700,42020 42777.48,42020 42867.48,41930 U13.8@42867.48,41900 ; 42973,43538 43052,43538 43150,43440 C138.1@43150,43420 43223,43347 43437,43347 43580,43490 43670,43490 43700,43460 ; R74.1@43800,43460 43700,43460 ; J4.1@43961,43280 43949,43280 43909,43240 43740,43240 43700,43280 43700,43460
  Top Layer w30: v2(39880,42200) 39880,42185 C31.1@39910,42155 ; v2(39880,43020) 39900,43040 C144.1@39900,43055 ; R124.1@40360,40260 40360,40006 J17.1@40370,39996 ; U18.8@40425,43360 v2(40460,43395) 40510.25,43395 C143.1@40520,43385.25 ; R53.1@41313,42030 41590,42030 v2(41600,42020) ; 41784.37,43335.63 41810,43310 R67.2@41810,43095 42137,43095 42202,43030 C64.1@42273,43030 42318,42985 42400,42985 42445,43030 C74.2@42813,43030 ; J16.1@43586,42760 D5.1@43586,42855 ; v2(43780,43185) 43780,43220 R73.1@43800,43240
  Bottom Layer w30: J17.1@40370,39996 39880,40486 39880,43069 40206,43395 41820,43395 ; v2(41600,42020) 42780,42020 42880,42120 42880,42400 42940,42460 ; v1(42200,43032) 42692,42540 42860,42540 42940,42460 ; v2(43780,43185) 43780,42954 J16.1@43586,42760 43680,42666 43680,42420 43640,42380 43160,42380 v2(43080,42460) 42940,42460
  other v2: 42458,42020 42760,42020 41820,43440
+5VAA: C22.2 C23.1 C46.2 C47.2 C48.2 C49.2 D6.2 M1.6 U6.8 U7.8 | length 2526.5
  Top Layer w20: D6.2@40614.41,41851.5 U6.8@40614.41,41930.41 ; U6.8@40618,41931 40576,41931 40555,41910 40391,41910 40330,41971 40330,42290 C22.2@40280,42340 40220,42340 40030,42530 40030,42690 40100,42760 40889,42760 40959,42690 41198,42690 C49.2@41213,42705
+5VCC: R56.1 R90.2 R91.2 U9.6 | length 510.8
  Top Layer w20: v2(43660,42085) R56.1@43660,42140 ; U9.6@43781.37,41940 43850,41940 43891,41981 R91.2@43891,42075 43881,42085 v2(43830,42085)
  Bottom Layer w20: v2(43660,42085) v2(43830,42085)
+5VDD: C4.2 C5.1 C6.1 D2.1 L2.2 Q3.2 R4.1 R10.2 R13.2 R19.2 | length 4851.9
  Top Layer w20: D2.1@42535,44084 42886,44084 42920,44050 42920,43840 42899,43819 R4.1@42735,43819 ; 42760,43580 42760,43820
  Top Layer w40: Q3.2@41210.11,43166.02 R19.2@41287.09,43166.02 ; R13.2@42174,43439 42459,43439 42510.22,43490.22 L2.2@42510.22,43545
  Bottom Layer w40: v2(42540,43420) 42540,42880 42760,42660 43364,42660 43484,42540 v2(43580,42540)
  Bottom Layer w60: v2(41200,43205) 41365,43205 41470,43310 42328,43310 42438,43420 v2@42710,43420
  other v2: 43520,42540 41340,43200 41240,43205 41290,43214 42600,43420 42660,43420 42720,43420
+12V: C21.1 C36.2 C37.2 D8.2 Q2.3 RE1.1 RE2.1 RE3.1 RE4.1 RE5.1 RE6.1 RE7.1 RE8.1 RE9.1 RE10.1 RE11.1 RE12.1 RE13.1 RE14.1 RE15.1 RE16.1 RE17.1 U4.8 U15.10 | length 13613.2
  Top Layer w30: C36.2@39940,41845 40080,41845 40120,41885 40120,42160 ; 39975,41845 C37.2@39975,41940 ; RE3.1@40070,41345 40130,41405 40295,41405 40355,41345 RE2.1@40590,41345 ; U4.8@40225,42160 40120,42160 ; Q2.3@41030.02,43307.64 40879.64,43307.64 40772,43200 40720,43200 40680,43160 40680,43020 40640,42980 40000,42980 39960,42940 39960,42320 40120,42160 ; RE7.1@41110,41345 41185,41420 41555,41420 RE6.1@41630,41345 ; v1@41740.33,41565.67 U15.10@41800,41565.67 ; RE11.1@42170,41345 42245,41420 42615,41420 RE10.1@42690,41345
  Bottom Layer w30: 39940,41345 RE3.1@40070,41345 ; RE5.1@40070,40855 39940,40985 39940,41705 RE1.1@40070,41835 ; 40500,40855 RE4.1@40590,40855 ; RE9.1@41110,40855 41110,40831 41020,40741 41020,40520 40980,40480 40540,40480 40500,40520 40500,41255 40665,41420 41035,41420 RE7.1@41110,41345 41331,41566 v1(41740,41566) ; RE8.1@41630,40855 41705,40930 41705,41270 RE6.1@41630,41345 41705,41420 42095,41420 RE11.1@42170,41345 ; 42000,41420 42000,41025 RE13.1@42170,40855 ; RE12.1@42690,40855 42765,40930 42765,41270 RE10.1@42690,41345 42765,41420 43565,41420 43640,41345 ; RE17.1@43210,40855 43285,40930 43285,41270 RE15.1@43210,41345 43210,41420 ; RE16.1@43730,40855 43640,40945 43640,41345 ; RE14.1@43730,41345 43640,41345
+VIN: C8.1 C9.1 C10.2 C60.1 D4.2 F1.2 Q1.3 Q2.2 R1.2 R2.1 R14.2 R56.2 U1.2 U1.5 U9.2 | length 5834.7
  Top Layer w16: R2.1@42073.88,44024 42090,44024 42155.59,43958.41 U1.2@42335,43958.41 ; 42085,44132 42124,44132 42297.59,43958.41 ; U1.5@42512.17,43907.23 42552.77,43907.23 v2(42560,43900)
  Top Layer w20: 43510,42106 43510,42076 43446,42012 C60.1@43446,42010 43466,41990 U9.2@43561.37,41990
  Top Layer w40: Q2.2@41110.02,43344.64 41184.64,43344.64 41245,43405 41535,43405 41570,43440 41570,43665
  Bottom Layer w20: v2(42560,43900) 42560,44130
  Bottom Layer w30: v2(42060,44125) 43655,44125 43700,44080 43700,43739 43900,43539 43900,42220 43830,42150 v2(43520,42150)
  other v2: 43550,42150 42110,44125
+VIN_GPRS: C3.1 J2.1 J13.6 L1.2 | length 3845.6
  Top Layer w150: C3.1@40300,43500 40360,43500 L1.2@40478,43618 ; L1.2@40483.78,43640 40483.78,43763.78 40600,43880 J2.1@40600,44000
  Bottom Layer w80: J2.1@40600,44000 40835,43765 43195,43765 43420,43540 J13.6@43620,43540
-5VAA: C26.2 C27.1 C50.1 C51.1 C52.1 C53.1 D6.1 M1.4 U6.4 U7.4 | length 2646.3
  Top Layer w20: M1.4@40140,42620 40210,42550 40320,42550 40350,42520 40503,42520 C52.1@40563,42460 C53.1@40663,42460 40743,42540 U7.4@40773,42540 ; D6.1@40665.59,41851.5 40720,41905.91 40720,42025 40776,42081 40881,42081 40900,42100 v1(40900,42165) C51.1@41060,42165
  Bottom Layer w20: M1.4@40140,42620 40070,42550 40070,42220 40125,42165 v1(40900,42165)
A: J15.1 R119.1 U18.6 | length 891.2
  Top Layer w10: J15.1@39980,43540 39920,43480 39920,43375 39950,43345 40005,43345 40055,43395 40225,43395 40360,43260 U18.6@40410,43260
  Top Layer w20: U18.6@40410,43260 40471,43260 40500.75,43230.25 R119.1@40520,43230.25
ADC_RDY: R72.2
ADC_RST: R70.2
ADC_START: R71.2
AGND: C22.1 C23.2 C26.1 C27.2 C46.1 C47.1 C48.1 C49.1 C50.2 C51.2 C52.2 C53.2 M1.5 R17.1 R46.2 R47.2 R49.2 R50.2 R51.2 | length 5763.3
  Top Layer w20: R46.2@39960,41455 40015,41455 v2(40020,41460) ; C22.1@40280,42405 C26.1@40280,42495 ; v2(40410,41790) C47.1@40410,41845 C46.1@40510,41845 ; C23.2@40410,42855 41028,42855 C48.1@41113,42770 C49.1@41213,42770 ; v2(40500,42270) 40510,42260 R49.2@40510,42220 ; R50.2@40603,42555 40500,42555 40425,42630 40350,42630 R17.1@40280,42700 40110,42700 40070,42660 40070,42590 40210,42450 40450,42450 40505,42395 C53.2@40663,42395 ; C50.2@40960,42230 41070,42230 41110,42190 41110,42100 v2(41080,42070) R47.2@41020,42070 ; R51.2@41013,42395 41020,42388 v2(41020,42350) ; 41020,42230 v2(41020,42270)
  Bottom Layer w20: v2(40020,41460) 40120,41460 40160,41500 40160,41734 40196,41770 40390,41770 v2(40410,41790) 40410,42010 40470,42070 v2(41080,42070) ; v2(40500,42855) v2(40500,42270) v2(41020,42270) v2(41020,42350)
  other v2: 40500,42400
B: J15.2 R119.2 U18.7 | length 594.9
  Top Layer w10: J15.2@39980,43402.2 39992.8,43415 40238,43415 40343,43310 U18.7@40410,43310
  Top Layer w20: U18.7@40410,43310 40505.25,43310 R119.2@40520,43295.25
BLACK: RE1.3 RE3.4 RE5.4 RE7.4 RE9.4 RE11.4 RE13.4 RE15.4 RE17.4 | length 9635.6
  Top Layer w10: 39880.21,41045.79 RE3.4@40070,41045.79 ; RE1.3@40070,41622.4 40022.6,41575 39920,41575 39880,41535 39880,40620 39944.21,40555.79 RE5.4@40070,40555.79 40205.79,40420 40360,40420 40870,39910 42595,39910 42645,39960 42645,40358 42727,40440 42925,40440 42965,40480 42965,40945 43065.79,41045.79 RE15.4@43210,41045.79 ; 41110,40440 RE9.4@41110,40555.79 ; RE7.4@41110,41045.79 40985.79,41045.79 40940,41000 40940,40460 40960,40440 41207,40440 41350,40297 41350,39910 ; 41980,39910 41980,40455 42010,40485 42010,41010 42045.79,41045.79 RE11.4@42170,41045.79 ; 42010,40555.79 RE13.4@42170,40555.79
  Bottom Layer w10: RE17.4@43210,40555.79 43140,40625.79 43140,40975.79 RE15.4@43210,41045.79
BLACK_CH1: J9.2 RE3.3 | length 1760.3
  Top Layer w10: RE3.3@40070,41132.4 40132.6,41132.4 40160,41105 40160,40981 40211,40930 40835,40930 40860,40905 40860,40300 40880,40280 40984,40280 41003.74,40299.74 J9.2@41003.74,40338
BLACK_CH2: J10.2 RE5.3 | length 1335.4
  Top Layer w10: RE5.3@40070,40642.4 40137.6,40642.4 40160,40620 40160,40507 40227,40440 40380,40440 40880,39940 40983.74,39940 41003.74,39960 J10.2@41003.74,39996.26
BLACK_CH3: J11.2 RE7.3 | length 1268.5
  Top Layer w10: RE7.3@41110,41132.4 41172.6,41132.4 41200,41105 41200,40960 41240,40920 41340,40920 41365,40895 41365,40408 41493,40280 41589,40280 41608.74,40299.74 J11.2@41608.74,40338
BLACK_CH4: J12.2 RE9.3 | length 1103.8
  Top Layer w10: RE9.3@41110,40642.4 41177.6,40642.4 41200,40620 41200,40480 41370,40310 41370,39990 41420,39940 41589,39940 41608.74,39959.74 J12.2@41608.74,39996.26
BLACK_CH5: J5.2 RE11.3 | length 1509.6
  Top Layer w10: RE11.3@42170,41132.4 42227.6,41132.4 42260,41100 42260,40973 42313,40920 42387,40920 42425,40882 42425,40518 42362,40455 42155,40455 42080,40380 42080,40295 42115,40260 42198,40260 42233.74,40295.74 J5.2@42233.74,40338
BLACK_CH6: J6.2 RE13.3 | length 1219.9
  Top Layer w10: RE13.3@42170,40642.4 42230.6,40642.4 42260,40613 42260,40540 42215,40495 42055,40495 42000,40440 42000,40000 42060,39940 42214,39940 42233.74,39959.74 J6.2@42233.74,39996.26
BLACK_CH7: J7.2 RE15.3 | length 1606.1
  Top Layer w10: J7.2@42838.74,40338 42838.74,40299.74 42819,40280 42720,40280 42695,40305 42695,40375 42740,40420 42945,40420 42985,40460 42985,40925 43045,40985 43278,40985 43300,41007 43300,41100 43267.6,41132.4 RE15.3@43210,41132.4
BLACK_CH8: J8.2 RE17.3 | length 1521.8
  Top Layer w10: J8.2@42838.74,39996.26 42838.74,39953.74 42825,39940 42705,39940 42685,39960 42685,40045 42725,40085 43240,40085 43300,40145 43300,40613 43270.6,40642.4 RE17.3@43210,40642.4
BLACK_R: R46.1 RE1.4 | length 116.5
  Top Layer w20: R46.1@39960,41520 40054.21,41520 RE1.4@40070,41535.79
BLACK_T: R25.1 RE1.2 | length 164.8
  Top Layer w20: R25.1@39940,41625 39959,41625 40043.02,41709.02 RE1.2@40070,41709.02
BOOT0: R121.1 R122.2 U11.94 | length 245
  Top Layer w10: U11.94@43212.96,42693.93 43367.93,42693.93 ; R122.2@43368,42638 R121.1@43368,42728
BOOT1: R123.2 U11.37 | length 158.6
  Top Layer w10: R123.2@42458,42610 42472.5,42595.5 U11.37@42610.6,42595.5
CH1_CN: RE2.8 RE3.8 U15.11 | length 1763.7
  Top Layer w10: RE3.8@40270,41345 40295,41345 40360,41280 40725,41280 40925,41480 41830,41480 41850,41500 U15.11@41850,41565.67
CH2_CN: RE4.8 RE5.8 U15.12 | length 2251.5
  Top Layer w10: RE5.8@40270,40855 40325,40910 40735,40910 RE4.8@40790,40855 ; v2(40925,41060) 40940,41075 40940,41420 40980,41460 41860,41460 41900,41500 U15.12@41900,41565.67
  Bottom Layer w10: RE4.8@40790,40855 40925,40990 v2(40925,41060)
CH3_CN: RE6.8 RE7.8 U15.13 | length 835.9
  Top Layer w10: RE7.8@41310,41345 41365,41290 41775,41290 41950,41465 U15.13@41950,41565.67
CH4_CN: RE8.8 RE9.8 U15.14 | length 1888.1
  Top Layer w10: v2(41940,41305) 42000,41365 U15.14@42000,41565.67
  Bottom Layer w10: RE9.8@41310,40855 41380,40785 41380,40535 41415,40500 41725,40500 41760,40535 41760,40785 41900,40925 41900,41265 v2(41940,41305)
CH5_CN: RE10.8 RE11.8 U15.15 | length 1182.9
  Top Layer w10: U15.15@42050,41565.67 42050,41308 42068,41290 42835,41290 RE10.8@42890,41345 ; 42370,41290 RE11.8@42370,41345
CH6_CN: RE12.8 RE13.8 U15.16 | length 2180.1
  Top Layer w10: v2(42080,41320) 42100,41340 U15.16@42100,41565.67
  Bottom Layer w10: v2(42080,41320) 42130,41270 42410,41270 42440,41240 42440,40535 42475,40500 42785,40500 42820,40535 42820,40785 RE12.8@42890,40855 ; RE13.8@42370,40855 42440,40855
CH7_CN: RE14.8 RE15.8 U15.17 | length 1955.4
  Top Layer w10: U15.17@42150,41565.67 42150,41500 42190,41460 43295,41460 43465,41290 43875,41290 RE14.8@43930,41345
CH8_CN: RE16.8 RE17.8 U15.18 | length 2843.9
  Top Layer w10: U15.18@42200,41565.67 42200,41500 42220,41480 43308,41480 43388,41400 43760,41400 v2(43840,41320) ; RE17.8@43410,40855 43460,40905 43880,40905 RE16.8@43930,40855
  Bottom Layer w10: v2(43840,41320) 43840,40945 RE16.8@43930,40855
CLOCK: U12.39 Y1.3 | length 263.3
  Top Layer w10: Y1.3@41620,42580 41620,42460 41640,42440 U12.39@41755,42440